# Altium PCB SignalConditioningShieldBackup.PcbDoc
Units mm, origin at the board's own origin, x right, y up, seen from the top; angles counter-clockwise.
Board outline 30.1 x 31.37 mm, 2 copper layers (Top Layer, Bottom Layer); 33 components, 26 nets, 89 pads, 13 vias.
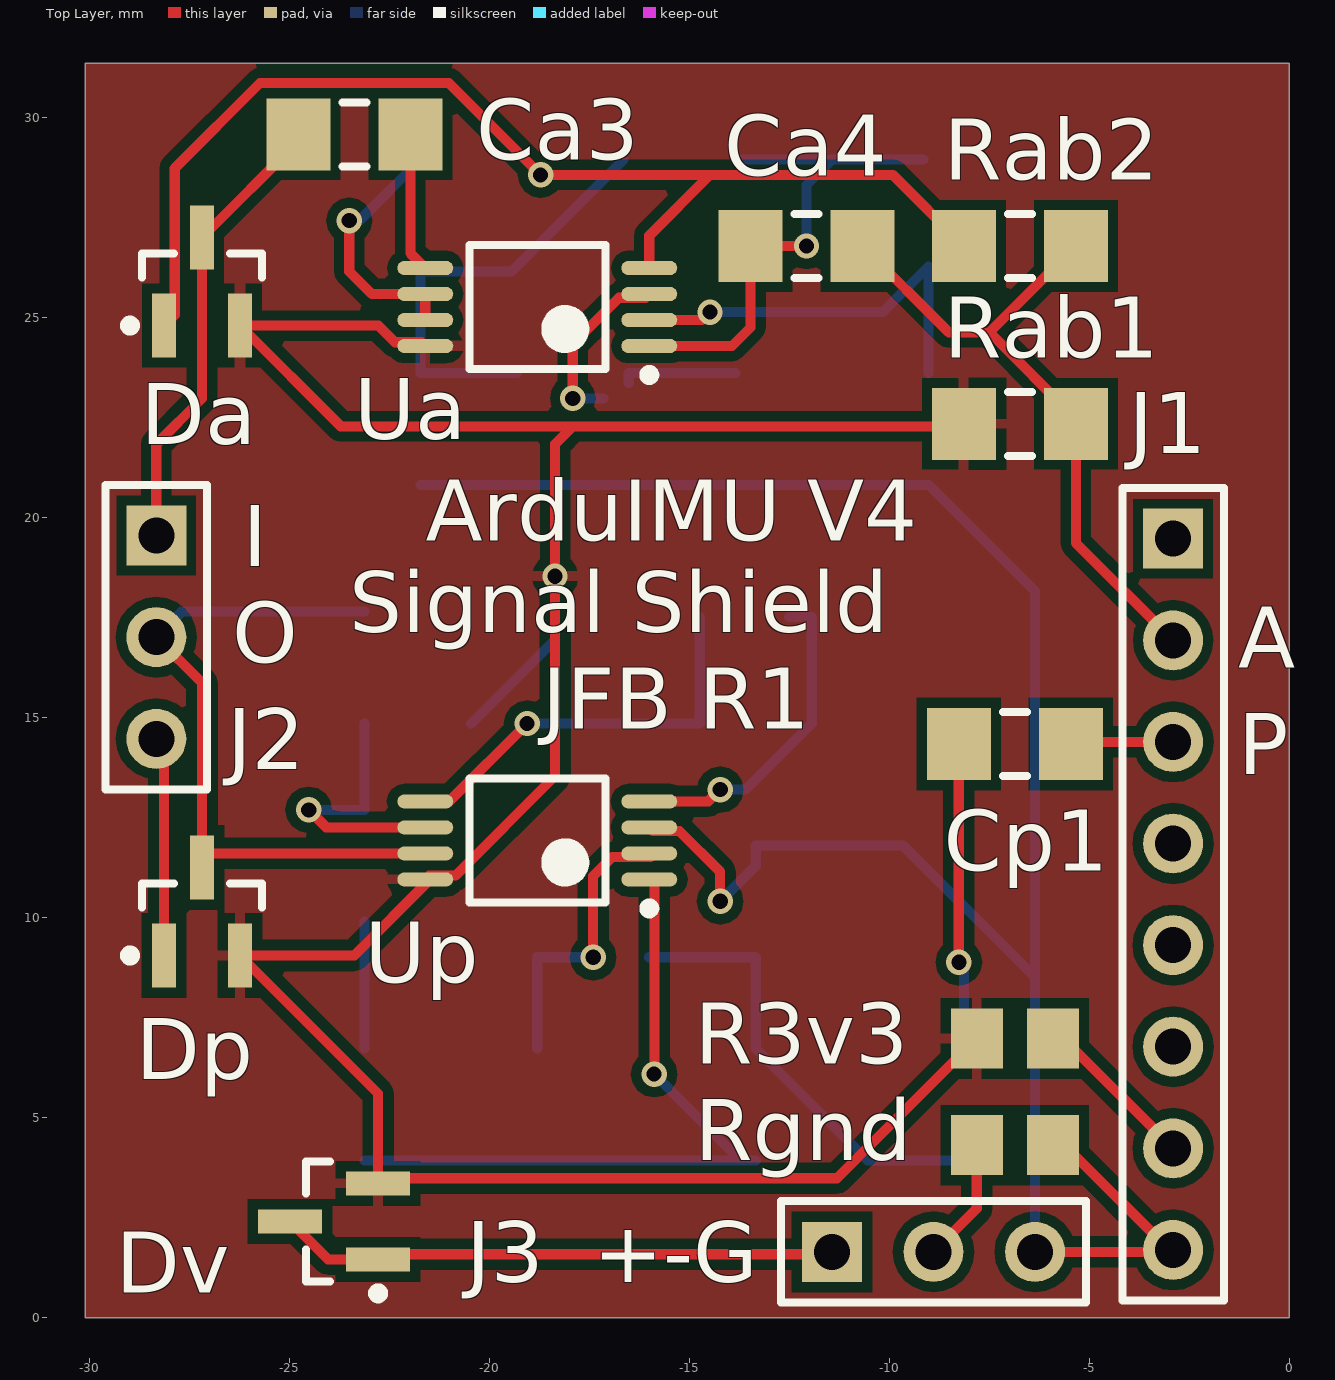
[diagram p0: Top Layer view]
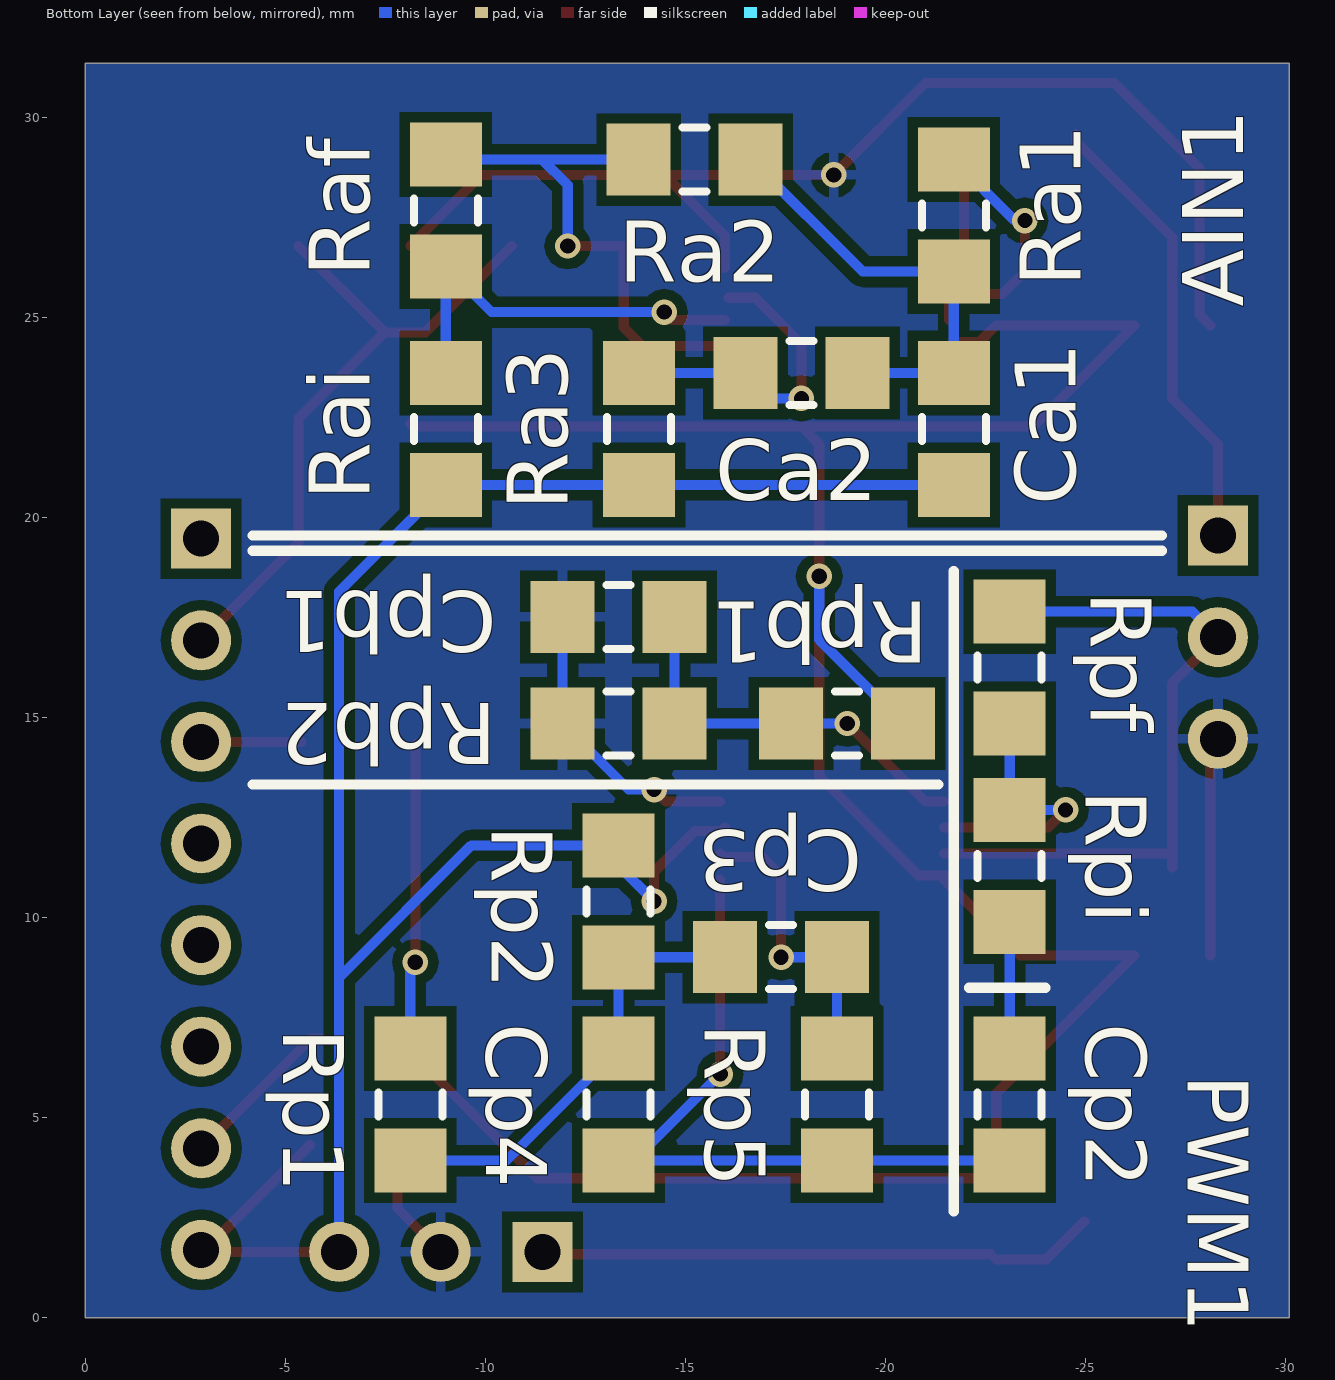
[diagram p1: Bottom Layer view, seen from below]

## Layer stack, top to bottom
Top Layer: signal copper 0.0356
Dielectric: dielectric 0.32, FR-4, Dk 4.8
Bottom Layer: signal copper 0.0356

## Board outline
-30.099,31.369 -30.099,0 0,0 0,31.369

## Design rules (kind name [scope] priority, off if disabled: settings)
Clearance [All] p1: gap=0.254
PolygonConnect [All] p1: connectstyle=Relief reliefconductorwidth=0.254 reliefentries=4 polygonreliefangle="90 Angle" airgapwidth=0.254
RoomDefinition SignalConditioningShield [InComponentClass('SignalConditioningShield')] p1: confinementstyle=ConfineIn formatcopy=TRUE lockcomponents=FALSE outline -30.099,0 0,0 0,31.369 -30.099,31.369
RoutingVias [All] p1: holewidth=0.711 width=1.27 viastyle="Through Hole" minholewidth=0.711 minwidth=1.27 maxholewidth=0.711 maxwidth=1.27
SolderMaskExpansion [All] p1: expansion=0.102
Width [All] p1: maxlimit=0.254 minlimit=0.254 preferedwidth=0.254
28 further rules are at their usual default settings.

## Components (designator, comment, footprint, x,y, rotation, side; value= is the part's Value field where it differs from the comment)
Ca1 "Cap Semi" 8-1206 -21.717,22.225 r90 bottom
Ca2 "Cap Semi" 8-1206 -17.907,23.622 r180 bottom
Ca3 "Cap Semi" 8-1206 -23.368,29.591 r0 top
Ca4 "Cap Semi" 8-1206 -12.065,26.797 r180 top
Cp1 "Cap Semi" 8-1206 -6.858,14.351 r0 top
Cp2 "Cap Semi" 8-1206 -23.114,5.334 r270 bottom
Cp3 "Cap Semi" 8-1206 -17.399,9.017 r0 bottom
Cp4 "Cap Semi" 8-1206 -13.335,5.334 r90 bottom
Cpb1 "Cap Semi" 8-1206 -13.335,17.526 r0 bottom
Da "BAT54S" SOT23_M -27.178,25.908 r90 top
Dp "BAT54S" SOT23_M -27.178,10.16 r90 top
Dv "BAT54S" SOT23_M -23.876,2.413 r180 top
J1 "ArduIMU_Connector" HDR1X8 -2.9,19.48 r270 top
J2 "Output" HDR1X3 -28.321,19.558 r270 top
J3 "OpAmp_Power" HDR1X3 -11.43,1.651 r0 top
R3v3 "0" 6-0805 -6.858,6.985 r0 top
Ra1 "0" 8-1206 -21.717,27.559 r270 bottom
Ra2 "0" 8-1206 -15.24,28.956 r0 bottom
Ra3 "0" 8-1206 -13.843,22.225 r270 bottom
Rab1 "0" 8-1206 -6.731,22.352 r180 top
Rab2 "0" 8-1206 -6.731,26.797 r0 top
Raf "0" 8-1206 -9.017,27.686 r270 bottom
Rai "0" 8-1206 -9.017,22.225 r270 bottom
Rgnd "0" 6-0805 -6.858,4.318 r0 top
Rp1 "0" 8-1206 -8.128,5.334 r270 bottom
Rp2 "0" 8-1206 -13.335,10.414 r90 bottom
Rp5 "0" 8-1206 -18.796,5.334 r270 bottom
Rpb1 "0" 8-1206 -19.05,14.859 r180 bottom
Rpb2 "0" 8-1206 -13.335,14.859 r180 bottom
Rpf "0" 8-1206 -23.114,16.256 r90 bottom
Rpi "0" 8-1206 -23.114,11.303 r270 bottom
Ua "TS9222IDT" TSSOP8_L -18.796,25.273 r180 top
Up "TS9222IDT" TSSOP8_L -18.796,11.938 r180 top

## Footprints (in the part's own frame and the unit in brackets; to place one, negate y for a bottom-side part, rotate by r counter-clockwise, add the part's x,y. Pads: shape width x height; smd on the part's side, far side on the other; paste and mask are expansions set on the pad)
6-0805 [mm] "Chip Resistor; Body 2 x 1.2 mm (LxW typ)"
  rect 1.3x1.5 smd: 1(-0.95,0) 2(0.95,0)
8-1206 [mm] "Chip Resistor; Body 3.1 x 1.6 mm (LxW typ)"
  rect 1.6x1.8 smd: 1(-1.4,0) 2(1.4,0)
  silkscreen extent -0.3,-0.8 0.3,0.8
HDR1X3 [mm] "Connector; Header; 3 Position"
  rect 1.5x1.5 hole 0.9: 1(0,0)
  round 1.5 hole 0.9: 2(2.54,0) 3(5.08,0)
  silkscreen extent -1.27,-1.27 6.35,1.27
HDR1X8 [mm] "Connector; Header; 8 Position"
  rect 1.5x1.5 hole 0.9: 1(0,0)
  round 1.5 hole 0.9: 2(2.54,0) 3(5.08,0) 4(7.62,0) 5(10.16,0) 6(12.7,0) 7(15.24,0) 8(17.78,0)
  silkscreen extent -1.27,-1.27 19.05,1.27
SOT23_M [mm] "SOT23, 3-Leads, Body 2.9x1.3mm, Pitch 0.95mm, Lead Span 2.3mm, IPC Low Density"
  rect 1.6x0.6 smd: 1(-1.1,0.95) 2(-1.1,-0.95) 3(1.1,0)
  silkscreen extent -1.22,-1.5 0.7,1.92, body extent -0.7,-1.5 0.7,1.5, height 1.1
TSSOP8_L [mm] "TSOP, 8-Leads, Body 3x4.4mm, Pitch 0.65mm, IPC High Density"
  oval 1.4x0.35 smd: 1(-2.8,0.975) 2(-2.8,0.325) 3(-2.8,-0.325) 4(-2.8,-0.975) 5(2.8,-0.975) 6(2.8,-0.325) 7(2.8,0.325) 8(2.8,0.975)
  silkscreen extent -2.93,-1.55 1.7,1.82, body extent -2.25,-1.55 2.25,1.55, height 1.2

## Part data
Ca1 Ca2 Ca3 Ca4 Cp1 Cp2 Cp3 Cp4 Cpb1: "Capacitor (Semiconductor SIM Model)"
Da Dp Dv: "Schottky Barrier Double Diode"
J1: library part "Header 8", "Header, 8-Pin"
J2 J3: library part "Header 3", "Header, 3-Pin"
R3v3 Rgnd: library part ERJ6GE, "Thick Film Chip Resistor, 1 Ohm to 10M Ohm Range, 5% Tolerance, 0805 Size, 0.125 W"
Ra1 Ra2 Ra3 Rab1 Rab2 Raf Rai Rp1 Rp2 Rp5 Rpb1 Rpb2 Rpf Rpi: library part ERJ8EN, "Precision Thick Film Chip Resistor, 10 Ohm to 2.2M Ohm Range, 1% Tolerance, 1206 Size, 0.125 W"
Ua Up: "High precision, high stability dual operational amplifier"

## Via types
v1: diameter 0.635, hole 0.381, Top Layer to Bottom Layer, 13 vias

## Nets (pads, with @x,y where several pads share a name; then routed paths per layer and width w, separated by ;. In a path a pad name is that pad's centre, name@x,y a point inside that pad or via, vN(x,y) a via of type N, cw(c..) or ccw(c..) an arc to the next point about the centre after c; other vN are vias at no path point)
3V3: J1.7 R3v3.2 | length 4.1
  Top Layer w0.254: R3v3.2 -5.645,6.985 J1.7
AIN1: Ca4.1 J1.2 Rab1.1 Rab2.2 | length 16.6
  Top Layer w0.254: Ca4.1 -8.506,24.638 -7.49,24.638 ; Rab1.1 -5.331,19.371 J1.2 ; Rab1.1@-5.331,22.479 -7.49,24.638 ; Rab2.2 -7.49,24.638
GND: Ca1.1 J1.8 J3.3 Ra3.2 Rai.2 Rgnd.2 Rp2.2 Up.3 | length 53.2
  Top Layer w0.254: Up.3 -15.902,12.169 -15.241,12.169 -14.224,11.152 v1(-14.224,10.414) ; J3.3 -2.949,1.651 Rgnd.2@-5.616,4.318
  Bottom Layer w0.254: Ca1.1 Ra3.2 Rai.2 -6.35,18.158 -6.35,8.509 ; v1(-14.224,10.414) -13.335,11.303 Rp2.2 -9.655,11.814 -6.35,8.509 ; J3.3 -6.35,8.509
MISO: J1.5
MOSI: J1.4
NetCa1_2: Ca1.2 Ca2.2 Ra1.2 Ra2.1 | length 11.2
  Bottom Layer w0.254: Ca2.2@-19.31,23.625 Ca1.2 Ra1.2 -19.437,26.159 Ra2.1
NetCa2_1: Ca2.1 Ra3.1 Ua.3 | length 7.3
  Top Layer w0.254: v1(-17.907,22.987) -17.907,24.348 -16.751,25.504 Ua.3@-16.09,25.504
  Bottom Layer w0.254: v1(-17.907,22.987) Ca2.1@-17.142,22.987 ; Ca2.1@-16.507,23.371 Ca2.1 ; Ca2.1@-16.504,23.625 Ra3.1
NetCa3_1: Ca3.1 Da.3 J2.1 | length 11.5
  Top Layer w0.254: J2.1 -28.321,21.844 -27.178,22.987 Da.3 -24.768,29.418 Ca3.1
NetCa3_2: Ca3.2 Ua.5 | length 3.5
  Top Layer w0.254: Ca3.2 -21.968,26.62 Ua.5
NetCa4_2: Ca4.2 Ra2.2 Raf.1 Ua.1 | length 13.3
  Top Layer w0.254: Ua.1 -13.929,24.298 -13.465,24.762 Ca4.2 v1(-12.065,26.797)
  Bottom Layer w0.254: Ra2.2 -11.43,28.956 ; v1(-12.065,26.797) -12.065,28.321 -11.43,28.956 ; Raf.1@-9.147,28.956 -11.43,28.956
NetCp1_1: Cp1.1 Rp1.1 | length 7.5
  Top Layer w0.254: v1@-8.258,8.893 Cp1.1
  Bottom Layer w0.254: Rp1.1 v1@-8.128,8.763
  other v1: -8.255,8.89
NetCp2_1: Cp2.1 Rpi.2 | length 3.2
  Bottom Layer w0.254: Cp2.1 Rpi.2
NetCp2_2: Cp2.2 Cp4.1 Rp5.2 Up.1 | length 17.7
  Top Layer w0.254: v1@-15.869,6.102 Up.1@-15.869,10.963
  Bottom Layer w0.254: Cp2.2 Rp5.2 Cp4.1@-13.713,3.934 ; v1(-15.875,6.096) Cp4.1@-13.713,3.934 ; Cp4.1 Cp4.1@-13.713,3.934
NetCp3_1: Cp3.1 Rp5.1 Up.2 | length 7.5
  Top Layer w0.254: v1(-17.399,9.017) -17.399,11.049 -16.929,11.519 -15.963,11.519 Up.2@-15.869,11.613
  Bottom Layer w0.254: Cp3.1 v1(-17.399,9.017) ; Rp5.1 Cp3.1@-18.796,9.014
NetCp3_2: Cp3.2 Cp4.2 Rp1.2 Rp2.1 | length 11.3
  Bottom Layer w0.254: Cp3.2 -13.338,9.017 Rp2.1 Cp4.2 -10.535,3.934 Rp1.2
NetCpb1_1: Cpb1.1 Rpb1.1 Rpb2.2 Up.5 | length 10.2
  Top Layer w0.254: Up.5@-21.469,12.913 -20.996,12.913 v1(-19.05,14.859)
  Bottom Layer w0.254: v1(-19.05,14.859) Rpb1.1 Rpb2.2 Cpb1.1
NetDp_3: Dp.3 J2.2 Rpf.2 Up.7 | length 17.4
  Top Layer w0.254: J2.2 -27.178,15.875 Dp.3 ; Dp.3@-27.122,11.613 Up.7@-21.469,11.613
  Bottom Layer w0.254: J2.2 -27.683,17.656 Rpf.2
NetDv_1: Dv.1 Dv.3 J3.1 | length 13.8
  Top Layer w0.254: Dv.3 -24.026,1.463 Dv.1 ; Dv.1@-22.649,1.59 J3.1@-11.491,1.59
NetRa1_1: Ra1.1 Ua.6 Ua.7 | length 6.2
  Top Layer w0.254: v1(-23.495,27.432) -23.495,26.162 -22.931,25.598 Ua.6 Ua.7
  Bottom Layer w0.254: v1@-23.244,27.432 Ra1.1
NetRaf_2: Raf.2 Rai.1 Ua.2 | length 9.9
  Top Layer w0.254: Ua.2 v1@-14.676,24.948
  Bottom Layer w0.254: v1(-14.478,25.146) -10.157,25.146 Raf.2 Rai.1
NetRpf_1: Rpf.1 Rpi.1 Up.6 | length 6.7
  Top Layer w0.254: v1(-24.511,12.7) -24.074,12.263 Up.6@-21.469,12.263
  Bottom Layer w0.254: v1(-24.511,12.7) Rpi.1@-23.203,12.7 ; Rpi.1 Rpf.1
PWM1: Cp1.2 J1.3 | length 2.5
  Top Layer w0.254: Cp1.2@-5.409,14.4 J1.3
RST1: J1.1
SCK: J1.6
V+: Da.2 Dp.2 Dv.2 R3v3.1 Rab1.2 Rpb1.2 Ua.8 Up.8 | length 70.6
  Top Layer w0.254: Dv.2 -22.776,5.608 Dp.2 -23.372,9.06 Up.8@-21.469,10.963 ; Dv.2@-22.649,3.49 -11.303,3.49 R3v3.1 ; Ua.8@-21.69,24.392 -22.351,24.392 -22.767,24.808 Da.2 -23.709,22.288 -17.907,22.288 ; Up.8 -21.502,11.057 -20.841,11.057 -18.351,13.546 v1(-18.351,18.542) -18.351,21.844 -17.907,22.288 ; Rab1.2 -8.194,22.288 -17.907,22.288
  Bottom Layer w0.254: Rpb1.2 -18.351,16.957 v1(-18.351,18.542)
V-: Cpb1.2 Da.1 Dp.1 J2.3 J3.2 Rab2.1 Rgnd.1 Rpb2.1 Ua.4 Up.4 | length 46.1
  Top Layer w0.254: J2.3 J2.3@-28.321,14.756 ; Dp.1 J2.3@-28.128,14.285 ; Da.1 -27.859,25.077 -27.859,28.739 -25.726,30.872 -21.01,30.872 v1(-18.713,28.575) -14.478,28.575 ; Ua.4 -15.996,27.057 -14.478,28.575 ; Up.4@-15.869,12.913 -14.519,12.913 v1(-14.224,13.208) ; J3.2@-8.702,1.651 J3.2 -7.808,2.733 Rgnd.1 ; Rab2.1 -9.909,28.575 -14.478,28.575
  Bottom Layer w0.254: v1(-14.224,13.208) -13.586,13.208 Rpb2.1 Cpb1.2 Cpb1.2@-12.496,17.526

## Polygon pours and split planes (outlines as drawn)
V- on Bottom Layer "Top Layer-No Net" (solid, pour order 8): 0,31.369 -30.099,31.369 -30.099,0 0,0
V+ on Top Layer "Top Layer-No Net" (solid, pour order 10): 0,31.369 -30.099,31.369 -30.099,0 0,0

## Silkscreen, mask and mechanical layers (free items; w line width, h text height)
Top Overlay:
  text "ArduIMU V4" at -21.59,19.431 h1.52
  text "I" at -26.162,18.796 h1.52
  text "Signal Shield" at -23.495,17.145 h1.52
  text "O" at -26.416,16.383 h1.52
  text "A" at -1.27,16.256 h1.52
  text "JFB R1" at -18.669,14.732 h1.52
  text "P" at -1.27,13.589 h1.52
  text "+-G" at -17.399,0.889 h1.52
Bottom Overlay:
  lines w0.254: -26.924,19.177 -4.191,19.177 ; -26.924,19.558 -4.191,19.558 ; -24.003,8.255 -22.098,8.255 ; -21.717,2.667 -21.717,18.669 ; -21.336,13.335 -4.191,13.335
  text "AIN1" at -28.956,25.273 h1.52 r270
  text "PWM1" at -27.559,6.096 h1.52 r90